# Altium PCB NEW_PCB_2020-06-18_21-19-14.pcbdoc
Units mil, origin at the board's own origin, x right, y up, seen from the top; angles counter-clockwise.
Board outline 2520 x 4105 mil, 2 copper layers (Top Layer, Bottom Layer); 4 components, 2 nets, 108 pads, 0 vias.
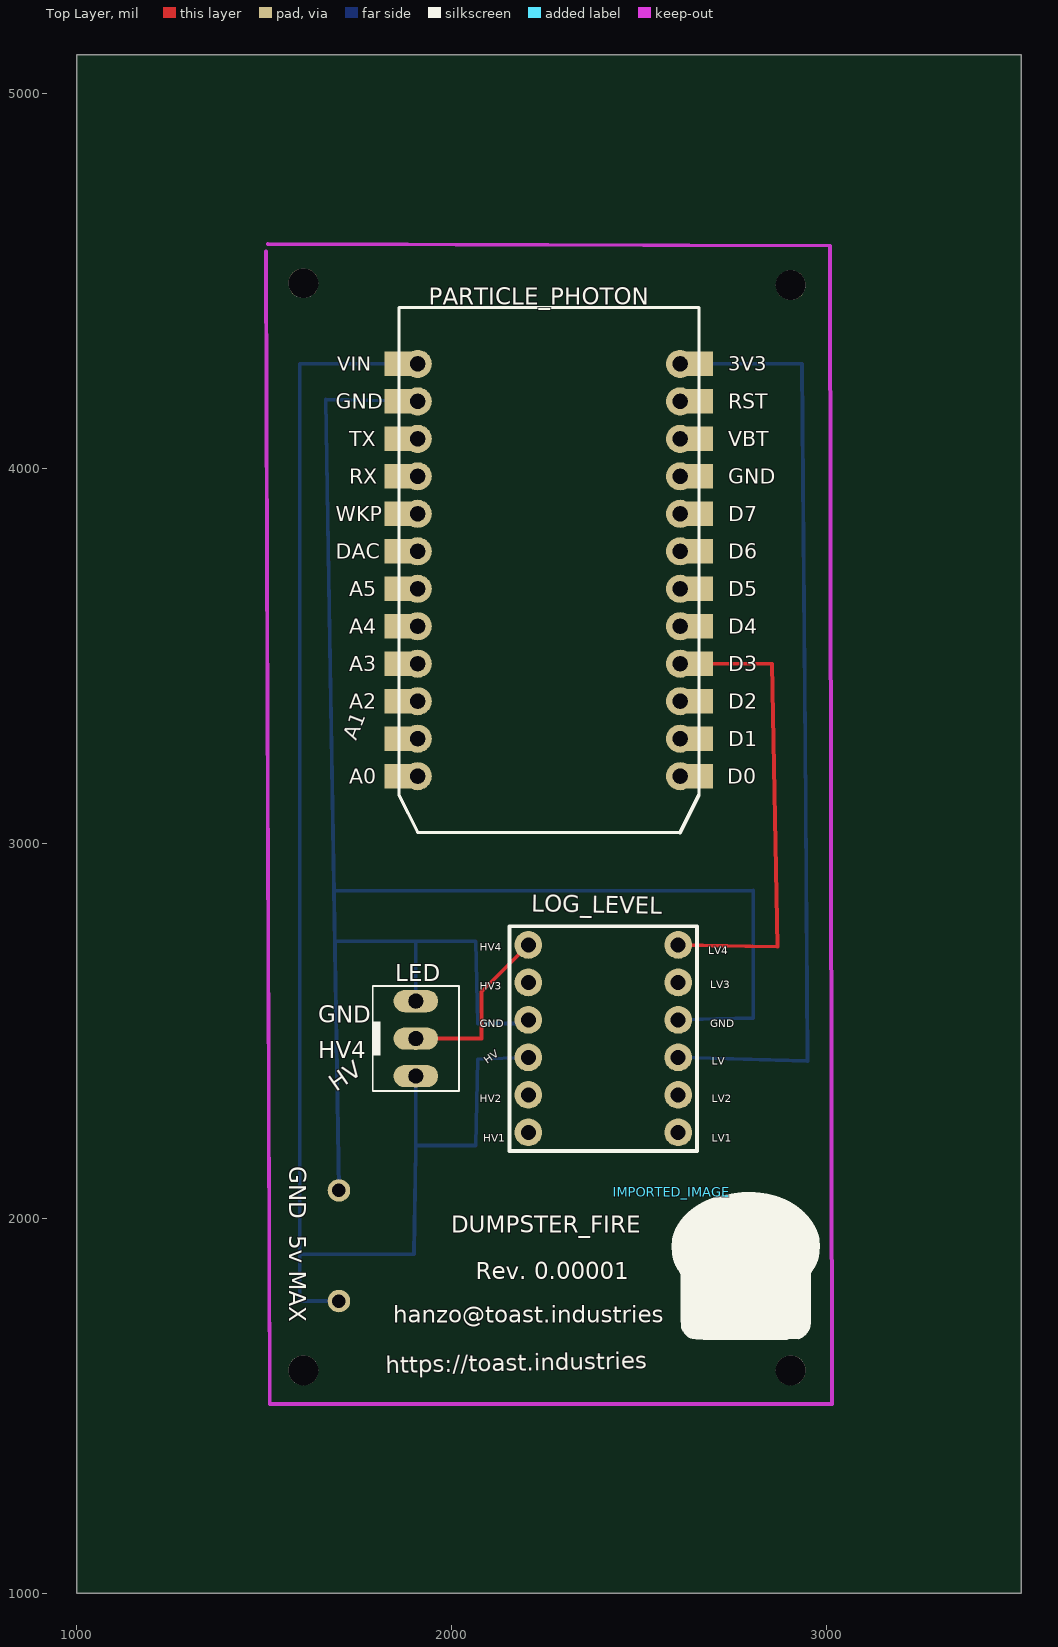
[diagram p0: Top Layer view]
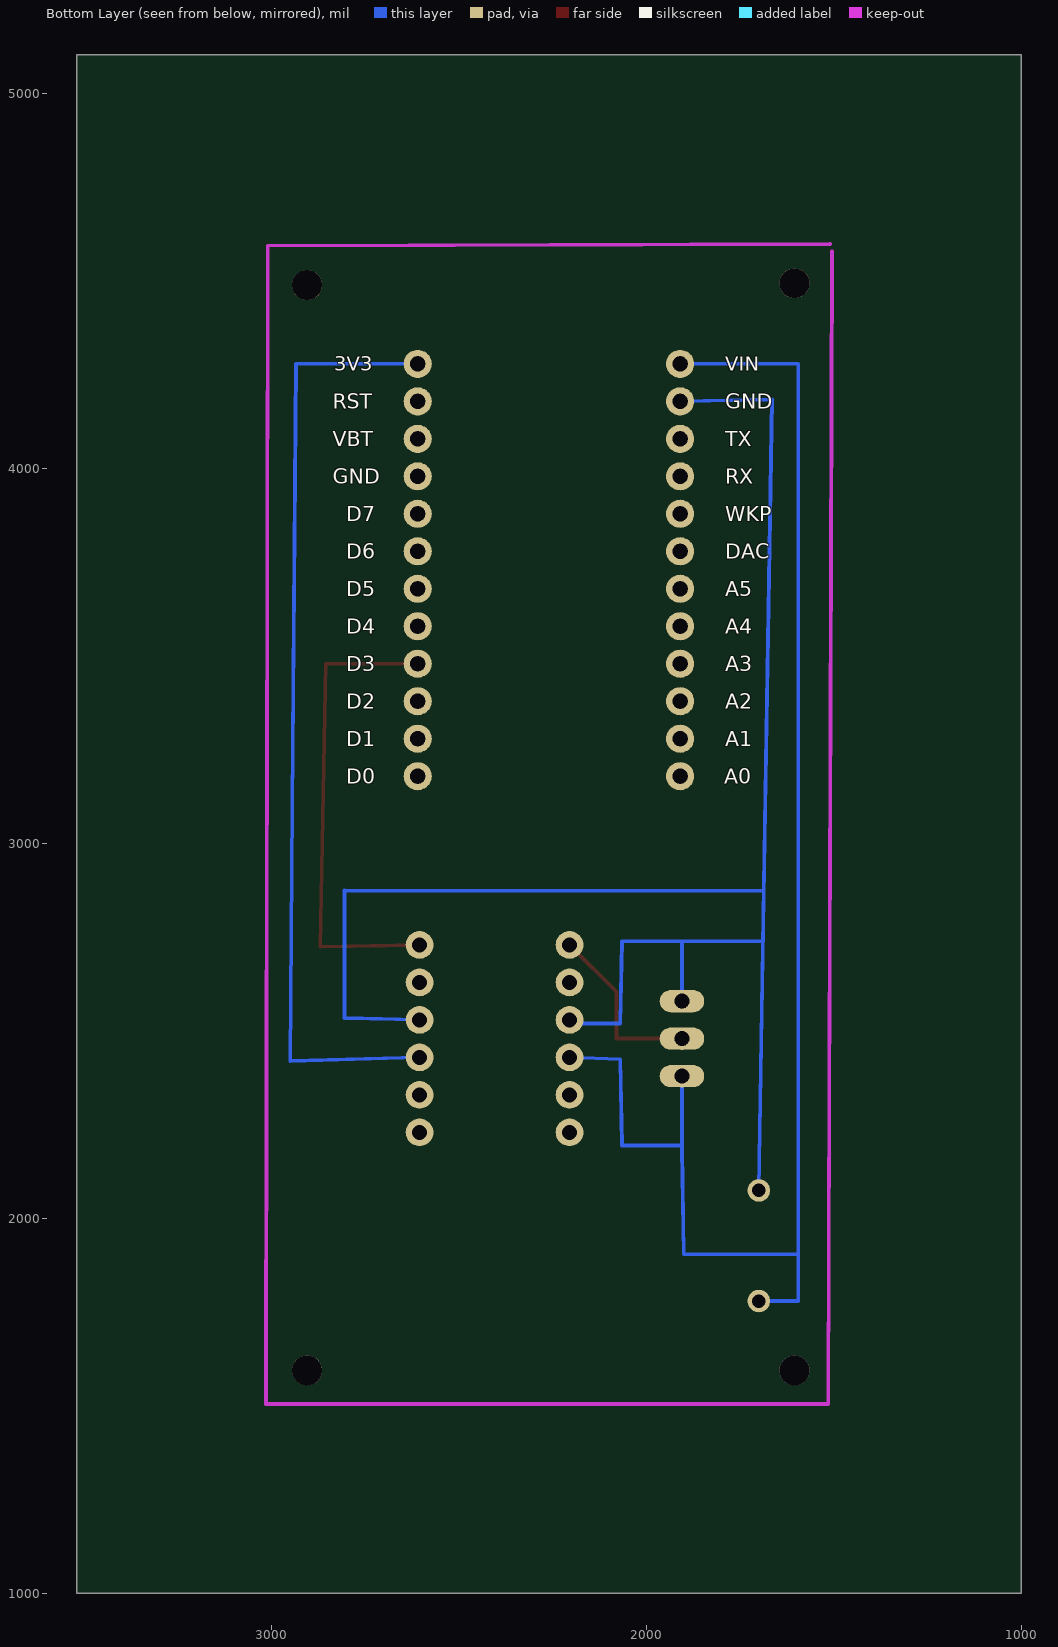
[diagram p1: Bottom Layer view, seen from below]

## Layer stack, top to bottom
Top Layer: signal copper (thickness not stored)
Dielectric: dielectric 12.6, FR-4, Dk 4.8
Bottom Layer: signal copper (thickness not stored)

## Board outline
3520,1000 1000,1000 1000,5105 3520,5105

## Components (designator, comment, footprint, x,y, rotation, side; value= is the part's Value field where it differs from the comment)
IMPORTED_IMAGE "IMPORTED_IMAGE" IMPORTED_IMAGE 2588.21,2070.32 r0 top
LED "3WIREJST1MM" 3WIREJST1MM 1905,2380 r270 top
LOG_LEVEL "SPARKFUN_LOGIC_LEVEL_CONVERTER" SPARKFUN_LOGIC_LEVEL_CONVERTER 2405,2480 r180 top
PARTICLE_PHOTON "DIP24-6" DIP24-6 2290,3790 r0 top

## Footprints (in the part's own frame and the unit in brackets; to place one, negate y for a bottom-side part, rotate by r counter-clockwise, add the part's x,y. Pads: shape width x height; smd on the part's side, far side on the other; paste and mask are expansions set on the pad)
3WIREJST1MM [mil]
  oval 59.37x118.71 hole 39.36: P$1(0,0) P$2(-100,0) P$3(-200,0)
  silkscreen extent -240,-115 40,115
DIP24-6 [mil]
  round 75 hole 40 slot 40.2 at 0 deg: 1(-380,490) 2(-380,390) 3(-380,290) 4(-380,190) 5(-380,90) 6(-380,-10) 7(-380,-110) 8(-380,-210) 9(-380,-310) 10(-380,-410) 11(-380,-510) 12(-380,-610) 13(320,-610) 14(320,-510) 15(320,-410) 16(320,-310) 17(320,-210) 18(320,-110) 19(320,-10) 20(320,90) 21(320,190) 22(320,290) 23(320,390) 24(320,490)
  rect 76x65 smd rot 0.1: 3V3(370,490) A0(-430,-610) A1(-430,-510) A2(-430,-410) A3(-430,-310) A4(-430,-210) A5(-430,-110) D0(370,-610) D1(370,-510) D2(370,-410) D3(370,-310) D4(370,-210) D5(370,-110) D6(370,-10) D7(370,90) DAC(-430,-10) GND@0(-430,390) GND@2(370,190) RST(370,390) RX(-430,190) TX(-430,290) VBAT(370,290) VIN(-430,490) WKP(-430,90)
  silkscreen extent -430,-760 370,640
IMPORTED_IMAGE [mil]
  silkscreen extent 0,-394 394,0
SPARKFUN_LOGIC_LEVEL_CONVERTER [mil]
  round 74 hole 40: GND1(-200,-50) GND2(200,-50) HV(200,50) HV1(200,250) HV2(200,150) HV3(200,-150) HV4(200,-250) LV(-200,50) LV1(-200,250) LV2(-200,150) LV3(-200,-150) LV4(-200,-250)
  silkscreen extent -250,-300 250,300

## Free pads (board coordinates)
  round 60 hole 36: 1(1910,4280) 2(1910,4180) 3(1910,4080) 4(1910,3980) 5(1910,3880) 6(1910,3780) 7(1910,3680) 8(1910,3580) 9(1910,3480) 10(1910,3380) 11(1910,3280) 12(1910,3180) 13(1905,2580) 14(1905,2480) 15(1905,2380) 16(1700,2075) 17(1700,1780) 18(2205,2230) 19(2205,2330) 20(2205,2430) 21(2205,2530) 22(2205,2630) 23(2205,2730) 25(2605,2630) 26(2605,2530) 27(2605,2430) 28(2605,2330) 29(2605,2230) 30(2610,3180) 31(2610,3280) 32(2610,3380) 33(2610,3480) 34(2610,3580) 35(2610,3680) 36(2610,3780) 37(2610,3880) 38(2610,3980) 39(2610,4080) 40(2610,4180) 41(2610,4280) 42(2605,2730)
  round 80 hole 80 unplated: ""(1605,1595) ""(1605,4495) ""(2905,1595) ""(2905,4490)

## Nets (pads, with @x,y where several pads share a name; then routed paths per layer and width w, separated by ;. In a path a pad name is that pad's centre, name@x,y a point inside that pad or via, vN(x,y) a via of type N, cw(c..) or ccw(c..) an arc to the next point about the centre after c; other vN are vias at no path point)
S$1029: LOG_LEVEL.LV pad.27 pad.41 | length 2530.2
  Bottom Layer w10: pad.27 2950,2420 2945,3100 2935,4280 pad.41
S$1033: LED.P$1 LED.P$2 LED.P$3 LOG_LEVEL.GND1 LOG_LEVEL.GND2 LOG_LEVEL.HV LOG_LEVEL.HV4 LOG_LEVEL.LV4 pad.1 pad.2 pad.13 pad.14 pad.15 pad.16 pad.17 pad.20 pad.21 pad.23 pad.26 pad.33 pad.42 PARTICLE_PHOTON.1 PARTICLE_PHOTON.16 | length 10883.5
  Top Layer w10: pad.14 2080,2480 2080,2605 pad.23 ; pad.42@2600.61,2733.45 2601.55,2733.45 pad.42 2870,2725 2855,3480 pad.33
  Bottom Layer w10: 1594.8,1904.8 1900,1905 1905,2184.93 pad.15 ; 1687,2874 2805,2875 2805,2535 pad.26 ; 1689,2740 1920,2740 2065,2740 2070,2520 2195,2520 pad.21 ; pad.17 1595,1780 1595,4280 pad.1 ; pad.16 1665,4185 pad.2 ; 1905,2195 2065,2195 2070,2425 pad.20 ; pad.13 1905,2735.9 1909.1,2740
pads on no net: LOG_LEVEL.HV1 LOG_LEVEL.HV2 LOG_LEVEL.HV3 LOG_LEVEL.LV1 LOG_LEVEL.LV2 LOG_LEVEL.LV3 PARTICLE_PHOTON.2 PARTICLE_PHOTON.3 PARTICLE_PHOTON.3V3 PARTICLE_PHOTON.4 PARTICLE_PHOTON.5 PARTICLE_PHOTON.6 PARTICLE_PHOTON.7 PARTICLE_PHOTON.8 PARTICLE_PHOTON.9 PARTICLE_PHOTON.10 PARTICLE_PHOTON.11 PARTICLE_PHOTON.12 PARTICLE_PHOTON.13 PARTICLE_PHOTON.14 PARTICLE_PHOTON.15 PARTICLE_PHOTON.17 PARTICLE_PHOTON.18 PARTICLE_PHOTON.19 PARTICLE_PHOTON.20 PARTICLE_PHOTON.21 PARTICLE_PHOTON.22 PARTICLE_PHOTON.23 PARTICLE_PHOTON.24 PARTICLE_PHOTON.A0 PARTICLE_PHOTON.A1 PARTICLE_PHOTON.A2 PARTICLE_PHOTON.A3 PARTICLE_PHOTON.A4 PARTICLE_PHOTON.A5 PARTICLE_PHOTON.D0 PARTICLE_PHOTON.D1 PARTICLE_PHOTON.D2 PARTICLE_PHOTON.D3 PARTICLE_PHOTON.D4 PARTICLE_PHOTON.D5 PARTICLE_PHOTON.D6 PARTICLE_PHOTON.D7 PARTICLE_PHOTON.DAC PARTICLE_PHOTON.GND@0 PARTICLE_PHOTON.GND@2 PARTICLE_PHOTON.RST PARTICLE_PHOTON.RX PARTICLE_PHOTON.TX PARTICLE_PHOTON.VBAT PARTICLE_PHOTON.VIN PARTICLE_PHOTON.WKP

## Silkscreen, mask and mechanical layers (free items; w line width, h text height)
Top Overlay:
  text "GND" at 1645,2522.5 h45
  text "HV4" at 1645,2427.5 h45
  text "HV" at 1692.91,2336.57 h45 r35
  text "GND" at 1567.5,2140 h45 r270
  text "DUMPSTER_FIRE" at 2000,1962.5 h45
  text "5v MAX" at 1567.5,1955 h45 r270
  text "Rev. 0.00001" at 2065,1837.5 h45
  text "hanzo@toast.industries" at 1845,1722.5 h45
  text "https://toast.industries" at 1825.39,1587.5 h45 r1

## Text inside footprints (layer, text, board x,y; h text height)
LOG_LEVEL: Top Overlay "LV1" at 2695,2205 h20; Top Overlay "LV2" at 2695,2310 h20; Top Overlay "HV1" at 2085,2205 h20; Top Overlay "HV2" at 2075,2310 h20; Top Overlay "LV" at 2695,2410 h20; Top Overlay "GND" at 2690,2510 h20; Top Overlay "LV3" at 2690,2615 h20; Top Overlay "LV4" at 2685,2705 h20; Top Overlay "HV" at 2095.88,2411.91 h20 r36; Top Overlay "GND" at 2075,2510 h20; Top Overlay "HV3" at 2075,2610 h20; Top Overlay "HV4" at 2075,2715 h20
PARTICLE_PHOTON: Bottom Overlay "D0" at 2800,3160 h40; Bottom Overlay "A0" at 1792,3160 h40; Bottom Overlay "3V3" at 2832.6,4261 h38; Bottom Overlay "RST" at 2836,4160 h40; Bottom Overlay "VBT" at 2836,4060 h40; Bottom Overlay "GND" at 2836,3960 h40; Bottom Overlay "D7" at 2800,3860 h40; Bottom Overlay "D6" at 2800,3760 h40; Bottom Overlay "D5" at 2800,3660 h40; Bottom Overlay "D4" at 2800,3560 h40; Bottom Overlay "D3" at 2800,3460 h40; Bottom Overlay "D2" at 2800,3360 h40; Bottom Overlay "D1" at 2800,3260 h40; Bottom Overlay "A1" at 1790,3260 h40; Bottom Overlay "A2" at 1790,3360 h40; Bottom Overlay "A3" at 1790,3460 h40; Bottom Overlay "A4" at 1790,3560 h40; Bottom Overlay "A5" at 1790,3660 h40; Bottom Overlay "DAC" at 1790,3760 h40; Bottom Overlay "WKP" at 1790,3860 h40; Bottom Overlay "RX" at 1790,3960 h40; Bottom Overlay "TX" at 1790,4060 h40; Bottom Overlay "GND" at 1790,4160 h40; Bottom Overlay "VIN" at 1790,4261 h38; Top Overlay "D0" at 2736,3160 h40; Top Overlay "A0" at 1728,3160 h40; Top Overlay "VIN" at 1695.4,4261 h38; Top Overlay "3V3" at 2738,4261 h38; Top Overlay "RST" at 2738,4160 h40; Top Overlay "VBT" at 2738,4060 h40; Top Overlay "GND" at 2738,3960 h40; Top Overlay "D7" at 2738,3860 h40; Top Overlay "D6" at 2738,3760 h40; Top Overlay "D5" at 2738,3660 h40; Top Overlay "D4" at 2738,3560 h40; Top Overlay "D3" at 2738,3460 h40; Top Overlay "D2" at 2738,3360 h40; Top Overlay "D1" at 2738,3260 h40; Top Overlay "A1" at 1746.67,3272.83 h40 r69; Top Overlay "A2" at 1728,3360 h40; Top Overlay "A3" at 1728,3460 h40; Top Overlay "A4" at 1728,3560 h40; Top Overlay "A5" at 1728,3660 h40; Top Overlay "DAC" at 1692,3760 h40; Top Overlay "WKP" at 1692,3860 h40; Top Overlay "RX" at 1728,3960 h40; Top Overlay "TX" at 1728,4060 h40; Top Overlay "GND" at 1692,4160 h40; Document "VIN" at 1990,4243 h32 r90; Document "GND" at 1990,4139 h32 r90; Document "TX" at 1990,4055 h32 r90; Document "3V3" at 2529,4322 h32 r270; Document "RST" at 2528,4225 h32 r270; Document "VBAT" at 2529,4134 h30 r270; Document "GND" at 2528,4014 h32 r270; Document "D7" at 2529,3906 h32 r270; Document "D6" at 2529,3806 h32 r270; Document "D5" at 2529,3706 h32 r270; Document "D4" at 2529,3607 h32 r270; Document "D3" at 2529,3506 h32 r270; Document "D2" at 2529,3406 h32 r270; Document "D1" at 2529,3303 h32 r270; Document "D0" at 2529,3206 h32 r270; Document "WKP" at 1990,3844 h32 r90; Document "DAC" at 1991,3731 h32 r90; Document "A5" at 1990,3654 h32 r90; Document "A3" at 1990,3456 h32 r90; Document "A4" at 1990,3554 h32 r90; Document "RX" at 1990,3953 h32 r90; Document "A2" at 1990,3354 h32 r90; Document "A1" at 1990,3264 h32 r90; Document "A0" at 1990,3154 h32 r90